# Altium PCB USER_SW_Breakout.pcbdoc (part 5 of 5)
Units mm, origin at the board's own origin, x right, y up, seen from the top; angles counter-clockwise.
Board outline 125 x 23.5 mm, 2 copper layers (Top Layer, Bottom Layer), stack 0.533 mm thick; 24 components, 16 nets, 4985 pads, 3 vias.
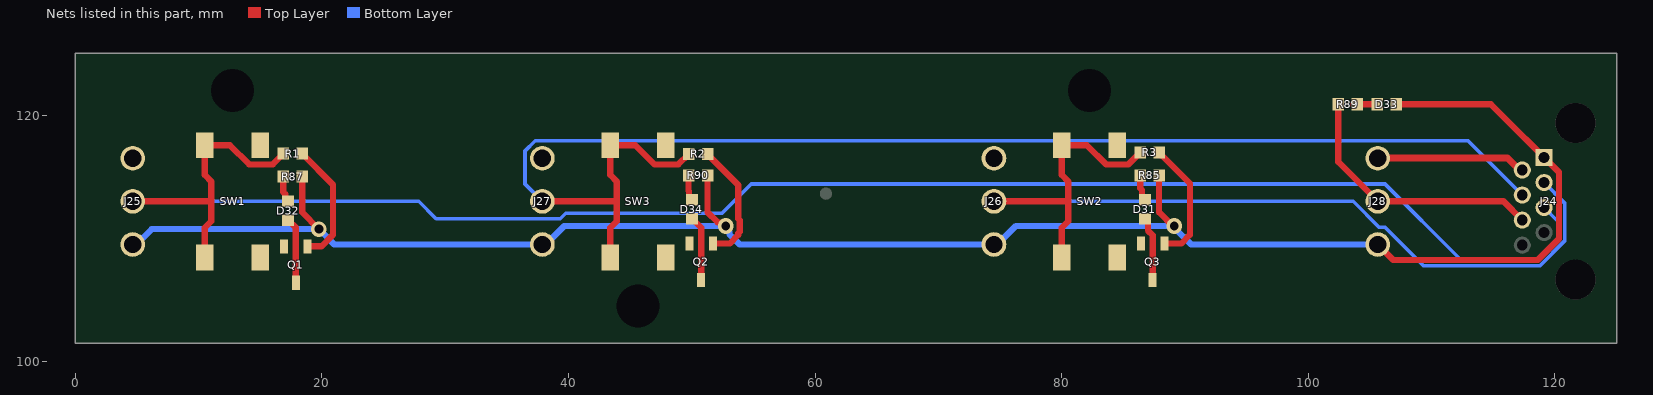
[diagram p5: the nets of this part, all layers, seen from the top]

## Footprints (in the part's own frame and the unit in brackets; to place one, negate y for a bottom-side part, rotate by r counter-clockwise, add the part's x,y. Pads: shape width x height; smd on the part's side, far side on the other; paste and mask are expansions set on the pad) (continued)
Expatria-Logo [mil] "Expatria DXF logo" (continued)
  round 1.64 on Mech4: 1(-44059.07,43534.74) 1(-44059.07,43705.17) 1(-44059.07,43705.17) 1(-44058.19,43687.28) 1(-44058.19,43687.28) 1(-44057.74,43705.63) 1(-44057.74,43705.63) 1(-44057.29,43510.14) 1(-44057.29,43510.14) 1(-44057.29,43687.28) 1(-44057.29,43687.28) 1(-44056.84,43533.42) 1(-44056.84,43533.42) 1(-44055.96,43707.41) 1(-44055.96,43707.41) 1(-44054.6,43532.96) 1(-44054.6,43532.96) 1(-44054.6,43707.86) 1(-44054.6,43707.86) 1(-44054.14,43509.72) 1(-44054.14,43509.72) 1(-44054.14,43708.77) 1(-44054.14,43708.77) 1(-44053.27,43691.75) 1(-44053.27,43691.75) 1(-44052.82,43709.19) 1(-44052.82,43709.19) 1(-44052.36,43531.63) 1(-44052.36,43531.63) 1(-44052.36,43691.75) 1(-44052.36,43691.75) 1(-44052.36,43710.1) 1(-44052.36,43710.1) 1(-44051.03,43508.36) 1(-44051.03,43508.36) 1(-44051.03,43710.55) 1(-44051.03,43710.55) 1(-44050.12,43531.18) 1(-44050.12,43531.18) 1(-44049.25,43712.34) 1(-44049.25,43712.34) 1(-44047.89,43529.85) 1(-44047.89,43529.85) 1(-44047.89,43712.79) 1(-44047.89,43712.79) 1(-44047.43,43713.66) 1(-44047.43,43713.66) 1(-44046.1,43507.49) 1(-44046.1,43507.49) 1(-44046.1,43714.12) 1(-44046.1,43714.12) 1(-44045.65,43529.4) 1(-44045.65,43529.4) 1(-44044.78,43699.83) 1(-44044.78,43699.83) 1(-44044.33,43715.9) 1(-44044.33,43715.9) 1(-44043.87,43699.83) 1(-44043.87,43699.83) 1(-44043.41,43528.04) 1(-44043.41,43528.04) 1(-44042.96,43506.13) 1(-44042.96,43506.13) 1(-44042.96,43716.35) 1(-44042.96,43716.35) 1(-44042.08,43717.72) 1(-44042.08,43717.72) 1(-44041.18,43527.62) 1(-44041.18,43527.62) 1(-44040.73,43718.14) 1(-44040.73,43718.14) 1(-44040.31,43719.05) 1(-44040.31,43719.05) 1(-44039.85,43505.67) 1(-44039.85,43505.67) 1(-44038.94,43526.25) 1(-44038.94,43526.25) 1(-44038.94,43719.5) 1(-44038.94,43719.5) 1(-44038.07,43720.83) 1(-44038.07,43720.83) 1(-44037.62,43706.54) 1(-44037.62,43706.54) 1(-44036.71,43504.34) 1(-44036.71,43504.34) 1(-44036.71,43525.8) 1(-44036.71,43525.8) 1(-44036.71,43706.54) 1(-44036.71,43706.54) 1(-44036.71,43721.28) 1(-44036.71,43721.28) 1(-44036.25,43722.19) 1(-44036.25,43722.19) 1(-44034.92,43722.61) 1(-44034.92,43722.61) 1(-44034.47,43723.52) 1(-44034.47,43723.52) 1(-44034.01,43709.65) 1(-44034.01,43709.65) 1(-44033.6,43503.89) 1(-44033.6,43503.89) 1(-44033.14,43709.65) 1(-44033.14,43709.65) 1(-44033.14,43723.97) 1(-44033.14,43723.97) 1(-44033.14,43524.02) 1(-44033.14,43524.02) 1(-44032.69,43724.85) 1(-44032.69,43724.85) 1(-44031.36,43725.3) 1(-44031.36,43725.3) 1(-44030.9,43523.56) 1(-44030.9,43523.56) 1(-44029.54,43727.08) 1(-44029.54,43727.08) 1(-44028.67,43502.11) 1(-44028.67,43502.11) 1(-44028.67,43522.23) 1(-44028.67,43522.23) 1(-44028.21,43727.54) 1(-44028.21,43727.54) 1(-44026.43,43521.78) 1(-44026.43,43521.78) 1(-44026.43,43729.32) 1(-44026.43,43729.32) 1(-44025.53,43501.65) 1(-44025.53,43501.65) 1(-44025.07,43729.77) 1(-44025.07,43729.77) 1(-44024.65,43730.68) 1(-44024.65,43730.68) 1(-44024.2,43520.45) 1(-44024.2,43520.45) 1(-44023.74,43719.5) 1(-44023.74,43719.5) 1(-44023.28,43731.14) 1(-44023.28,43731.14) 1(-44022.83,43719.5) 1(-44022.83,43719.5) 1(-44021.96,43520) 1(-44021.96,43520) 1(-44021.51,43732.92) 1(-44021.51,43732.92) 1(-44021.05,43519.09) 1(-44021.05,43519.09) 1(-44020.18,43722.61) 1(-44020.18,43722.61) 1(-44019.27,43722.61) 1(-44019.27,43722.61) 1(-44018.81,43518.67) 1(-44018.81,43518.67) 1(-44018.36,43734.25) 1(-44018.36,43734.25) 1(-44017.03,43735.61) 1(-44017.03,43735.61) 1(-44016.58,43517.31) 1(-44016.58,43517.31) 1(-44015.7,43736.03) 1(-44015.7,43736.03) 1(-44015.25,43727.08) 1(-44015.25,43727.08) 1(-44014.79,43498.96) 1(-44014.79,43498.96) 1(-44014.79,43737.39) 1(-44014.79,43737.39) 1(-44014.34,43516.85) 1(-44014.34,43516.85) 1(-44014.34,43727.08) 1(-44014.34,43727.08) 1(-44011.65,43739.17) 1(-44011.65,43739.17) 1(-44010.78,43497.18) 1(-44010.78,43497.18) 1(-44010.78,43515.07) 1(-44010.78,43515.07) 1(-44010.78,43731.14) 1(-44010.78,43731.14) 1(-44009.87,43731.14) 1(-44009.87,43731.14) 1(-44009.87,43735.61) 1(-44009.87,43735.61) 1(-44009.42,43732.92) 1(-44009.42,43732.92) 1(-44009.42,43735.61) 1(-44009.42,43735.61) 1(-44009.42,43732.47) 1(-44009.42,43732.47) 1(-44009,43733.37) 1(-44009,43733.37) 1(-44009,43738.72) 1(-44009,43738.72) 1(-44008.54,43514.62) 1(-44008.54,43514.62) 1(-44008.54,43732.47) 1(-44008.54,43732.47) 1(-44008.54,43738.72) 1(-44008.54,43738.72) 1(-44008.08,43740.08) 1(-44008.08,43740.08) 1(-44006.3,43513.29) 1(-44006.3,43513.29) 1(-44004.07,43512.83) 1(-44004.07,43512.83) 1(-44003.16,43511.96) 1(-44003.16,43511.96) 1(-44002.29,43495.85) 1(-44002.29,43495.85) 1(-44000.92,43494.94) 1(-44000.92,43494.94) 1(-44000.92,43511.51) 1(-44000.92,43511.51) 1(-43997.81,43494.49) 1(-43997.81,43494.49) 1(-43997.81,43509.72) 1(-43997.81,43509.72) 1(-43995.57,43509.27) 1(-43995.57,43509.27) 1(-43993.76,43507.91) 1(-43993.76,43507.91) 1(-43991.52,43507.49) 1(-43991.52,43507.49) 1(-43990.65,43506.58) 1(-43990.65,43506.58) 1(-43988.41,43506.13) 1(-43988.41,43506.13) 1(-43986.18,43504.8) 1(-43986.18,43504.8) 1(-43983.94,43504.34) 1(-43983.94,43504.34) 1(-43981.25,43490.47) 1(-43981.25,43490.47) 1(-43976.77,43500.32) 1(-43976.77,43500.32) 1(-43974.54,43499.87) 1(-43974.54,43499.87) 1(-43973.63,43498.96) 1(-43973.63,43498.96) 1(-43971.39,43498.54) 1(-43971.39,43498.54) 1(-43968.74,43487.36) 1(-43968.74,43487.36) 1(-43967.83,43496.31) 1(-43967.83,43496.31) 1(-43964.68,43495.4) 1(-43964.68,43495.4) 1(-43961.57,43493.16) 1(-43961.57,43493.16) 1(-43957.55,43486) 1(-43957.55,43486) 1(-43957.55,43491.38) 1(-43957.55,43491.38) 1(-43954.87,43488.69) 1(-43954.87,43488.69) 1(-43954.41,43486.91) 1(-43954.41,43486.91)
Fiducial10-20 [mm]
  round 1 smd mask+0.5: 1(0,0)
  Top Layer keep-out circle w1.178: c0,0 r0.5
FP-RJHSE-5080-MFG [mm]
  rect 1.39x1.39 hole 0.89 paste-1000 mask+0: 1(3.556,0.127)
  round 1.39 hole 0.89 paste-1000 mask+0: 2(2.54,1.905) 3(1.524,0.127) 4(0.508,1.905) 5(-0.508,0.127) 6(-1.524,1.905) 7(-2.54,0.127) 8(-3.556,1.905)
  round 3.25 hole 3.25 unplated paste-1000 mask+0: ""(-6.35,-2.413) ""(6.35,-2.413)
  silkscreen extent -8.06,-0.41 8.89,7.68, body extent -8.16,-7.78 8.16,7.78, height 0.25
SL_3_50_180G_03 [mm] "OMNIMATE Signal - Serie BL/SL 3.50  SL 3.50/03/180G 3.2"
  round 2 hole 1.4: A1(-3.5,-0.22) A2(0,-0.22) A3(3.5,-0.22)
  silkscreen extent -5.95,-3.73 5.95,3.73, body extent -5.95,-3.72 5.95,3.73, height 11.06
SOT-23-3L [mm] "http://www.aosmd.com/res/packaging_information/SOT-23-3L.pdf"
  rect 1.15x0.65 smd: 1(1.475,-0.95) 2(1.475,0.95) 3(-1.475,0)
  silkscreen extent -0.9,-1.95 1.6,1.55, body extent -0.9,-1.55 0.9,1.55, height 1.25
TECO-FSM4JSMATR_V [mm] "SMD, 4-Leads, Body 6x6mm, Pitch 4.5mm"
  rect 1.4x2.1 smd: 1(2.25,4.55) 2(2.25,-4.55) 3(-2.25,4.55) 4(-2.25,-4.55)
  silkscreen extent -3,-3 3.63,4.67, body extent -3,-5 3,5, height 5.08

## Part data
D31: library part "0603 LED Green", "LED", Color=Green, Package=0603, SuppliersPartNumber=C72043, Supplier=LC
D32: library part "0603 LED Red", "LED", Color=Red, Package=0603, SuppliersPartNumber=C2286, Supplier=LC
D33 D34: library part "0603 LED Yellow", "LED", Color=Yellow, Package=0603, SuppliersPartNumber=C72038, Supplier=LC
FID?: "FIDUCIAL NO ASSEMBLY", Manufacturer 1=NONE, Manufacturer Part Number 1=NONE
J24: library part CMP-02366-000003-1, "CONN MOD JACK 8P8C R/A UNSHLD", Manufacturer="Pulse Electronics Network", Manufacturer Part Number=E5J88-00LJG2-L, Package=CONN_MOD_JACK, SuppliersPartNumber=C385834, ComponentLink2Description=Datasheet, ComponentLink2URL=https://cdn.amphenol-icc.com/media/wysiwyg/files/documentation/datasheet/inputoutput/io-modjack-rjhse.pdf, Device Class L1=Connectors, Digikey Description="CONN MOD JACK 8P8C R/A UNSHLD", Pitch=1.02mm
J25 J26 J27 J28: library part CMP-1559-00904-1, "Header,Male Pin,Covered(4 Sided) 3 1 0.138\"（3.50mm） 3 P=3.5mm Pluggable System Terminal Block RoHS", Manufacturer="Ningbo Kangnex Elec", SuppliersPartNumber=C192778, UL_94_flammability_rating=V-0, PackageReference=SL_3_50_180G_03, Packaging=Box, PartNumber=WJ15EDGVC-3.5-3P, Pitch_inch="0.138 inch", Pitch_mm="3.5 mm", Revision=V1, Short_text_for_material="SL 3.50/03/180G 3.2SN OR BX", Side_termination_characteristic="closed side", Solder_pin_length_mm="3.2 mm"
Logo?: library part SBT-Logo, Manufacturer 1=NONE, Manufacturer Part Number 1=NONE
Q1 Q2 Q3: library part "AO3400A N道沟 X0YV1T SOT-23", "MOS(场效应管)", Package=SOT-23, SuppliersPartNumber=C700953, ComponentLink1Description=供应商链接, ComponentLink1URL=http://www.szlcsc.com/product/details_21629.html, Supplier=LC
R1 R2 R3 R85 R87 R89 R90: library part "0603 2K (2001) 1%", "Chip resistor", Manufacturer="Uniroyal Elec", Package=0603, PartNumber=0603WAF2001T5E, Power=1/10W, Resistance=2KΩ, SuppliersPartNumber=C22975, Tolerance=1%, ComponentLink1Description="Supplier link", ComponentLink1URL=http://www.szlcsc.com/product/details_23702.html, Supplier=LC
SW1 SW2 SW3: library part CMP-2000-07486-1, "Top Actuated 50mA @ 12VDC Round Button SPST 6*6mm Tactile Switches ROHS", Package=SMD-4_6.0x6.0x4.5P, SuppliersPartNumber=C127509

## Free pads (board coordinates)
  round 0 hole 3.5 unplated: 0(12.75,122) 0(45.625,104.5) 0(82.25,122)

## Via types
v1: diameter 1.27, hole 0.711, Top Layer to Bottom Layer, 3 vias

## Nets (pads, with @x,y where several pads share a name; then routed paths per layer and width w, separated by ;. In a path a pad name is that pad's centre, name@x,y a point inside that pad or via, vN(x,y) a via of type N, cw(c..) or ccw(c..) an arc to the next point about the centre after c; other vN are vias at no path point)
+12V_USER: D33.A J24.1 J25.A1 J26.A1 J27.A1 J28.A1 R85.2 R87.1 R90.1 | length 155.8
  Top Layer w0.508: R87.1@18.395,115 18.395,112.105 v1(19.75,110.75) ; R90.1@51.27,115 51.27,112.105 52.083,111.292 52.251,111.292 52.544,111 v1(52.75,111) ; R85.2@87.895,115 87.895,112.105 89,111 v1(89.125,111) ; J28.A1@105.625,109.5 106.884,108.241 118.607,108.241 120.328,109.962 120.328,115.353 114.806,120.875 D33.A@107.145,120.875
  Bottom Layer w0.508: J25.A1@4.655,109.5 4.938,109.5 6.188,110.75 19.708,110.75 19.854,110.604 19.896,110.604 21,109.5 J27.A1@37.831,109.5 ; J27.A1@37.875,109.5 38.158,109.5 39.658,111 v1(52.75,111) 52.75,110.794 53.042,110.501 53.042,110.333 53.875,109.5 74.783,109.5 76.283,111 v1(89.125,111) 89.125,110.875 90.5,109.5 J28.A1@105.625,109.5
CYC/ST_pnl: J24.3 J26.A2 R3.2 SW2.3 SW2.4 | length 77.3
  Top Layer w0.508: J26.A2@74.155,113 80.53,113 ; SW2.4@80,108.795 80,110.858 80.53,111.388 80.53,113 ; SW2.3@80,117.2 80,115.142 80.53,114.612 80.53,113 ; SW2.3@80,117.55 82.032,117.55 83.59,115.992 85.41,115.992 86.144,116.726 86.144,116.739 86.28,116.875 R3.2@86.355,116.875
  Bottom Layer w0.305: J26.A2@74.5,113 103.636,113 105.73,110.906 106.208,110.906 109.33,107.784 118.797,107.784 120.785,109.772 120.785,112.864 J24.3@119.125,114.524
DOOR_pnl: J24.6 J28.A2 R89.2 | length 21.5
  Top Layer w0.508: R89.2@102.5,120.764 102.5,120.709 102.43,120.639 102.43,116.195 J28.A2@105.625,113 115.823,113 J24.6@117.347,111.476
GND_USER: J24.2 J25.A3 J26.A3 J27.A3 J28.A3 Q1.2 Q2.2 Q3.2 SW1.1 SW1.2 SW2.1 SW2.2 SW3.1 SW3.2 | length 12.1
  Top Layer w0.559: J28.A3@105.625,116.5 116.162,116.5 117.122,115.54 J24.2@117.347,115.54
HALT_pnl: J24.5 J25.A2 R1.2 SW1.3 SW1.4 | length 146.1
  Top Layer w0.508: J25.A2@4.655,113 11.03,113 ; SW1.4@10.5,108.795 10.5,110.858 11.03,111.388 11.03,113 ; SW1.3@10.5,117.2 10.5,115.142 11.03,114.612 11.03,113 ; SW1.3@10.5,117.55 12.532,117.55 14.09,115.992 15.997,115.992 16.855,116.85 R1.2@16.855,116.875
  Bottom Layer w0.305: J25.A2@4.655,113 27.852,113 29.258,111.594 39.318,111.594 39.766,112.041 52.444,112.041 54.809,114.406 106.208,114.406 112.271,108.343 118.565,108.343 120.226,110.004 120.226,111.391 J24.5@119.125,112.492
HOLD_pnl: J24.4 J27.A2 R2.2 SW3.3 SW3.4 | length 110.3
  Top Layer w0.508: J27.A2@37.53,113 43.905,113 ; SW3.4@43.375,108.795 43.375,110.858 43.905,111.388 43.905,113 ; SW3.3@43.375,117.2 43.375,115.142 43.905,114.612 43.905,113 ; SW3.3@43.375,117.55 45.407,117.55 46.965,115.992 48.897,115.992 49.73,116.825 R2.2@49.73,116.85
  Bottom Layer w0.305: J27.A2@37.875,113 36.469,114.406 36.469,117.083 37.292,117.906 112.949,117.906 J24.4@117.347,113.508
NetD31_A: D31.A R85.1 | length 2
  Top Layer w0.508: R85.1@86.355,115 86.355,114.055 86.514,113.896 86.514,113.356 86.725,113.145 D31.A@86.75,113.145
NetD31_K: D31.K Q3.3 | length 5.3
  Top Layer w0.508: D31.K@86.75,111.605 86.775,111.605 86.986,111.394 86.986,110.632 87.375,110.243 Q3.3@87.375,106.625
NetD32_A: D32.A R87.2 | length 2.2
  Top Layer w0.508: R87.2@16.855,115 16.855,113.748 17.014,113.589 17.014,113.231 17.225,113.02 D32.A@17.25,113.02
NetD32_K: D32.K Q1.3 | length 5.4
  Top Layer w0.508: D32.K@17.25,111.48 17.275,111.48 17.875,110.88 Q1.3@17.875,106.4
NetD33_K: D33.K R89.1 | length 2
  Top Layer w0.508: R89.1@103.625,120.875 D33.K@105.605,120.875
NetD34_A: D34.A R90.2 | length 2
  Top Layer w0.508: R90.2@49.73,115 49.73,113.848 49.764,113.814 49.764,113.331 49.975,113.12 D34.A@50,113.12
NetD34_K: D34.K Q2.3 | length 5.3
  Top Layer w0.508: D34.K@50,111.58 50.025,111.58 50.75,110.855 Q2.3@50.75,106.625
NetQ1_1: Q1.1 R1.1 | length 10.1
  Top Layer w0.508: R1.1@18.395,116.875 18.395,116.85 20.893,114.352 20.893,110.277 19.966,109.35 Q1.1@18.825,109.35
NetQ2_1: Q2.1 R2.1 | length 10.1
  Top Layer w0.508: R2.1@51.27,116.85 51.27,116.825 53.768,114.327 53.768,111.598 53.893,111.473 53.893,110.527 53.768,110.402 53.768,110.277 53.066,109.575 Q2.1@51.7,109.575
NetQ3_1: Q3.1 R3.1 | length 10
  Top Layer w0.508: R3.1@87.895,116.85 88.006,116.739 88.106,116.739 90.393,114.452 90.393,110.277 89.691,109.575 Q3.1@88.325,109.575
pads on no net: FID?.1 J24. J24.7 J24.8 Logo?.1

## Polygon pours and split planes (outlines as drawn)
GND_USER on Bottom Layer "NONET_L-01_P-001" (solid, remove dead copper, pour order 0): 0,125 0,101.5 125,101.5 125,125
GND_USER on Top Layer "NONET_L-01_P-001" (solid, remove dead copper, pour order 1): 0,125 0,101.5 125,101.5 125,125

## Silkscreen, mask and mechanical layers (free items; w line width, h text height)
Top Overlay:
  circle w0.254: c45.75,113 r9.5
  circle w0.254: c12.75,113 r9.5
  circle w0.254: c82.375,113 r9.5
  lines w0.5: 0.25,101.75 0.25,124.75 124.75,124.75 124.75,101.75 0.25,101.75
  text "GND" at 3.5,119.75 h1.52
  text "GND" at 30.75,116.25 h1.52
  text "GND" at 67.5,116 h1.52
  text "GND" at 98.5,116 h1.52
  text "SIG" at 30.75,112.5 h1.52
  text "SIG" at 67.5,112.25 h1.52
  text "SIG" at 98.5,112.25 h1.52
  text "SIG" at 9.38,112.028 h1.52 r90
  text "HALT" at 21.375,110.375 h2.54 r90
  text "HOLD" at 54.348,110.375 h2.54 r90
  text "CYC/ST" at 90.72,109.5 h2.54 r90
  text "DOOR" at 111.098,109.5 h2.54 r90
  text "12V" at 30.625,108.75 h1.52
  text "12V" at 67.375,108.5 h1.52
  text "12V" at 98.375,108.5 h1.52
  text "12V" at 2.625,105.5 h1.52
Bottom Overlay:
  drawing of 679 lines, arcs and shapes, not listed
  text "Technologies" at 57.97,111.386 h1.52 r270
  text "Expatria" at 61.909,105.027 h2.54 r270
Bottom Solder:
  region: 42.621,123.302 42.651,123.902 42.528,123.902 42.559,123.313 cw(c42.491,123.314) 42.502,123.246 cw(c42.496,123.399) 42.483,123.247 41.898,123.349 41.977,123.131 cw(c41.896,123.109) 41.979,123.116 cw(c41.935,123.116) 41.963,123.081 41.321,122.562 41.466,122.494 cw(c41.447,122.454) 41.491,122.454 cw(c41.447,122.454) 41.489,122.44 41.362,122.05 41.732,122.129 cw(c41.737,122.078) 41.782,122.103 41.853,121.934 42.142,122.244 cw(c42.174,122.213) 42.174,122.258 cw(c42.173,122.212) 42.218,122.219 cw(c41.872,122.224) 42.217,122.205 42.078,121.488 42.301,121.617 cw(c42.324,121.578) 42.324,121.623 cw(c42.324,121.578) 42.363,121.598 42.59,121.153 42.816,121.598 cw(c42.856,121.578) 42.856,121.623 cw(c42.856,121.578) 42.878,121.617 43.101,121.488 42.962,122.205 cw(c43.012,122.209) 43,122.257 cw(c43.003,122.207) 43.038,122.244 43.326,121.934 43.398,122.103 cw(c43.439,122.085) 43.439,122.13 43.817,122.05 43.69,122.44 cw(c43.733,122.454) 43.688,122.454 cw(c43.733,122.454) 43.714,122.494 43.858,122.562 43.216,123.081 cw(c43.244,123.116) 43.2,123.116 cw(c43.244,123.116) 43.203,123.131 43.282,123.349 42.696,123.247 cw(c42.672,123.526) 42.682,123.246 cw(c42.685,123.31)
  text "Designed in Canada" at 20.25,123.517 h2.54 r180
Mechanical 6:
  lines w0.5: 0,101.5 101.5,101.5 125,101.5 125,125 0,125 0,101.5
Mechanical 15:
  lines w0.254: 218.44,155.746 218.44,158.286 218.44,158.286